# Altium PCB 步进电机（单）.PcbDoc
Units mm, origin at the board's own origin, x right, y up, seen from the top; angles counter-clockwise.
Board outline 94.26 x 60.25 mm, 2 copper layers (Top Layer, Bottom Layer); 48 components, 44 nets, 185 pads, 131 vias.
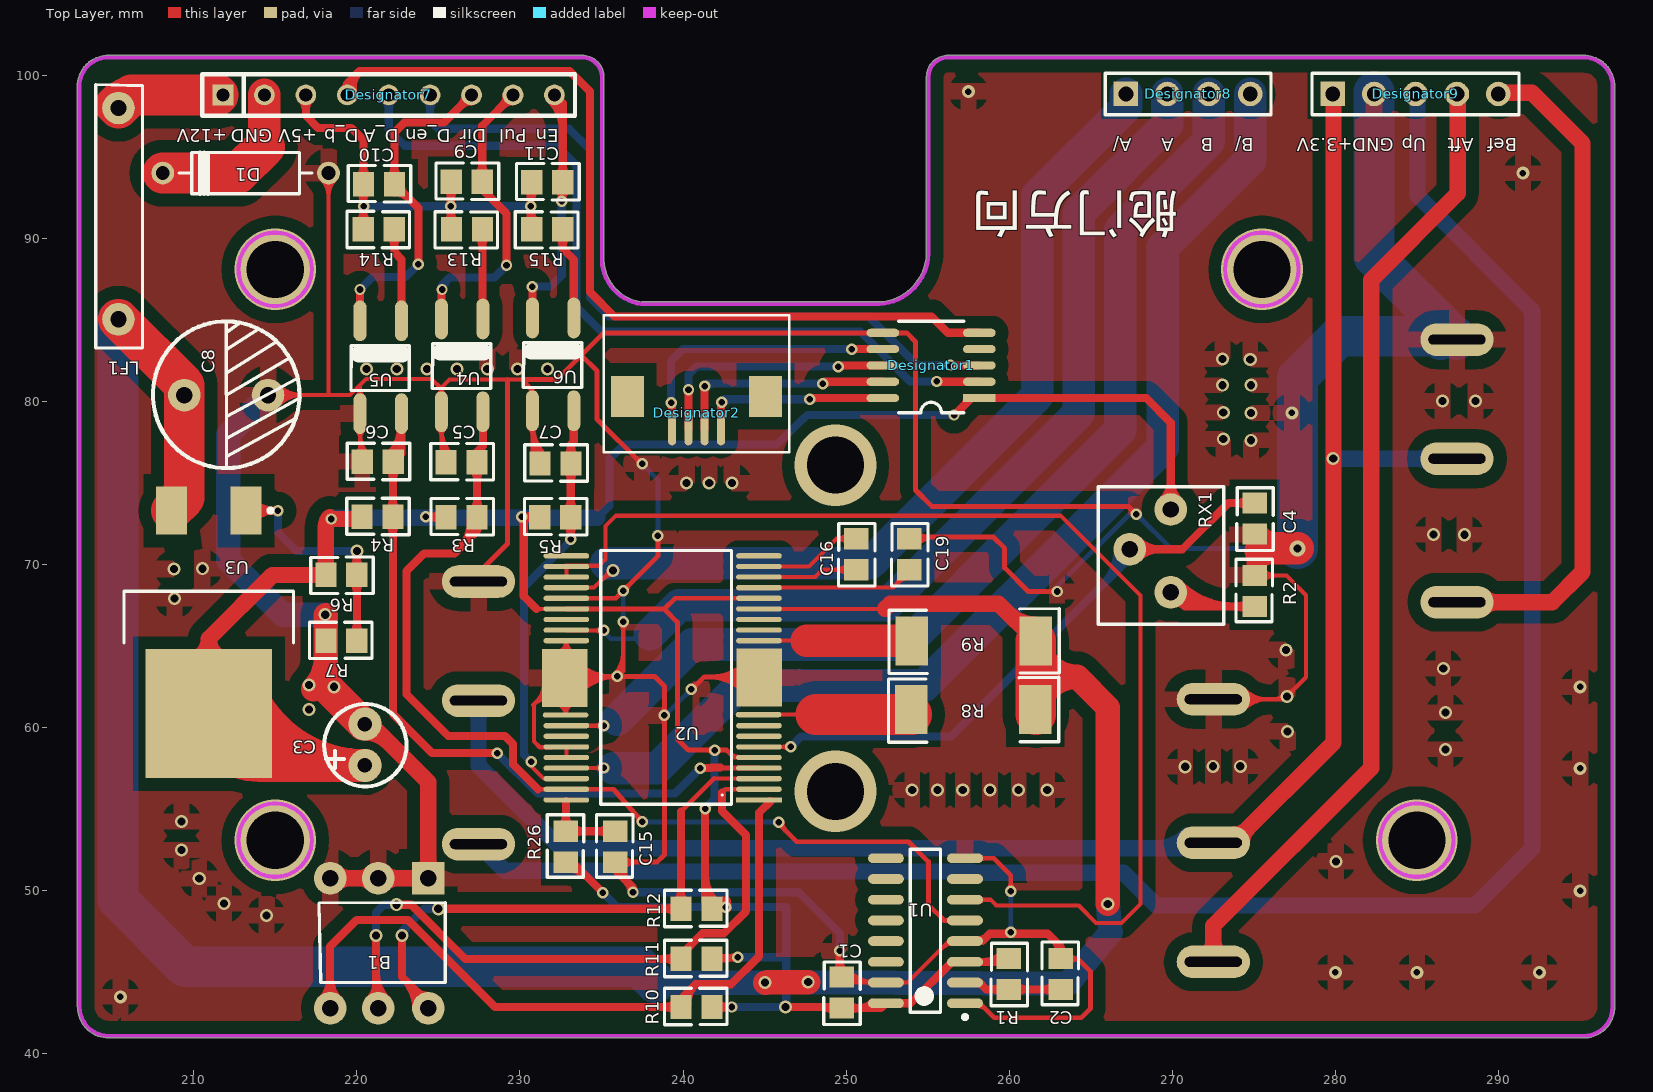
[diagram p0: Top Layer view]
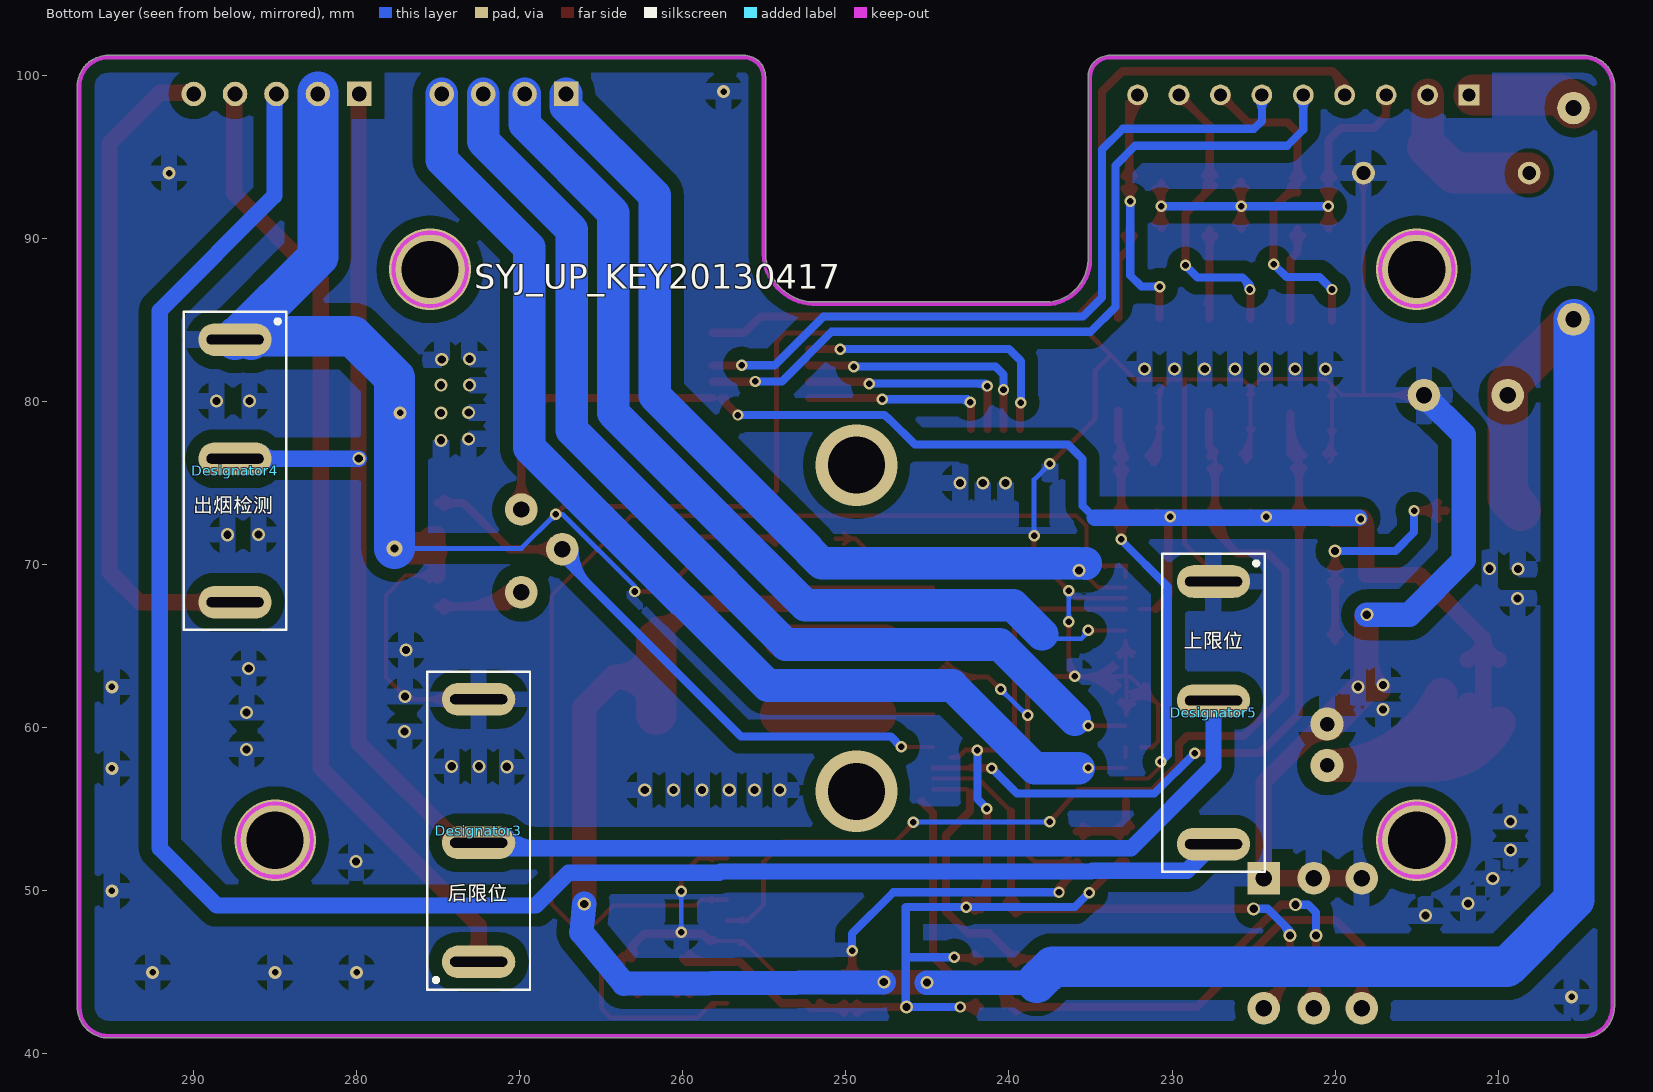
[diagram p1: Bottom Layer view, seen from below]

## Layer stack, top to bottom
Top Layer: signal copper 0.0356
Dielectric: dielectric 0.32, FR-4, Dk 4.8
Bottom Layer: signal copper 0.0356

## Board outline
202.876,42.851 ccw(c204.774,42.876) 204.774,40.978 295.194,40.978 ccw(c295.22,41.102) 295.22,40.975 ccw(c295.22,42.873) 297.113,42.728 ccw(c296.991,42.765) 297.118,42.765 297.118,99.298 ccw(c296.994,99.327) 297.122,99.327 ccw(c295.224,99.327) 295.224,101.225 256.259,101.225 ccw(c256.25,101.098) 256.25,101.226 ccw(c256.25,99.898) 254.923,99.911 ccw(c256.25,99.898) 254.923,99.898 254.923,99.907 cw(c255.05,99.907) 254.923,99.911 254.923,99.907 254.923,89.055 cw(c251.86,89.165) 251.753,86.102 ccw(c251.748,85.975) 251.748,86.102 237.468,86.102 cw(c237.804,88.733) 235.152,88.674 cw(c237.804,88.733) 235.152,88.675 235.152,88.672 235.152,99.898 ccw(c233.825,99.898) 233.825,101.226 ccw(c233.825,101.098) 233.816,101.225 204.76,101.225 ccw(c204.76,99.327) 202.862,99.327 ccw(c202.99,99.327) 202.864,99.309 202.864,42.906 ccw(c202.991,42.906)

## Design rules (kind name [scope] priority, off if disabled: settings)
Clearance [All] p1: gap=0.8
PlaneConnect [All] p1: planeconnectstyle=Relief reliefexpansion=0.508 reliefentries=4 reliefconductorwidth=0.5 reliefairgap=0.5
PolygonConnect [All] p1: connectstyle=Relief reliefconductorwidth=1 reliefentries=4 polygonreliefangle="90 Angle"
RoutingVias [All] p1: holewidth=0.711 width=1.27 viastyle="Through Hole" minholewidth=0.711 minwidth=1.27 maxholewidth=0.711 maxwidth=1.27
SilkscreenOverComponentPads [All] p1: minsilkscreentomaskgap=0.254
SolderMaskExpansion [All] p1: expansion=0.102
TestPointUsage [All] p1: valid=0 allowmultiple=FALSE
Testpoint [All] p1: side=3 testpointundercomponent=TRUE minsize=1.016 maxsize=2.54 preferedsize=1.524 minholesize=0 maxholesize=1.016 preferedholesize=0.813 testpointgrid=0.025 style=297 order=0123456789
Width [All] p1: maxlimit=3 minlimit=0.254 preferedwidth=0.5
22 further rules are at their usual default settings.

## Classes and differential pairs
component class 步进电机（单）: B1 C1 C2 C3 C4 C5 C6 C7 C8 C9 C10 C11 C15 C16 C19 D1 J1 J2 LF1 R1 R2 R3 R4 R5 R6 R7 R8 R9 R10 R11 R12 R13 R14 R15 R26 RX1 U1 U2 U3 U4 U5 U6

## Components (designator, comment, footprint, x,y, rotation, side; value= is the part's Value field where it differs from the comment)
B1 "DIP switch" 拨码开关-3 224.358,50.8 r0 top
C1 "104" 0805 249.718,43.757 r90 top
C2 "SOP-CAP" 0805 263.154,44.9 r270 top
C3 "10uF" CAP 220.497,58.953 r90 top
C4 "104" 0805 275.041,72.826 r90 top
C5 "104" 0805 226.416,76.276 r180 top
C6 "104" 0805 221.285,76.302 r180 top
C7 "104" 0805 232.181,76.2 r180 top
C8 "470uF" "470uF CAP" 214.554,80.391 r180 top
C9 "104" 0805 226.739,93.483 r180 top
C10 "104" 0805 221.354,93.331 r180 top
C11 "104" 0805 231.673,93.447 r180 top
C15 "104" 0805 235.839,52.705 r270 top
C16 "104" 0805 250.622,70.637 r90 top
C19 "104" 0805 253.873,70.637 r90 top
D1 "二极管" 二极管 213.182,94.005 r180 top
Designator1 "Comment" LB1848 257.708,80.213 r180 top
Designator2 "Comment" 间距1.0mm软排线底座 244.526,80.315 r180 top
Designator3 "Comment" 限位开关 275.666,43.944 r90 bottom
Designator4 "Comment" 限位开关 284.302,85.496 r270 bottom locked
Designator5 "Comment" 限位开关 224.307,70.663 r270 bottom locked
Designator7 "Comment" SIP9 211.811,98.806 r0 top
Designator8 "Comment" HDR1X4 267.157,98.857 r0 top
Designator9 "Comment" HDR1X5 279.832,98.857 r0 top
LF1 "LF" LF 205.384,98.019 r270 top
R1 "22R" 0805 259.979,44.9 r90 top
R2 "22R" 0805 275.044,68.381 r270 top
R3 "22R" 0805 226.422,72.907 r180 top
R4 "22R" 0805 221.259,72.923 r180 top
R5 "22R" 0805 232.163,72.907 r180 top
R6 "22R" 0805 219.05,69.367 r180 top
R7 "22R" 0805 219.05,65.329 r0 top
R8 "1R00" 1R00 254.991,59.588 r90 top
R9 "1R00" 1R00 255.016,63.805 r90 top
R10 "22R" 0805 240.817,42.875 r0 top
R11 "22R" 0805 240.817,45.822 r0 top
R12 "22R" 0805 240.817,48.895 r0 top
R13 "22R" 0805 226.746,90.551 r0 top
R14 "22R" 0805 221.348,90.571 r0 top
R15 "22R" 0805 231.673,90.551 r0 top
R26 "22R" 0805 232.816,52.705 r270 top
RX1 "F-RX" F-RX 269.9,73.381 r270 top
U1 "CD15438BM" CD14538BM 254.864,47.549 r180 top
U2 "TB62209FG" TB62209FG 244.704,59.487 r180 top
U3 "LM317" LM317-SOP 210.922,65.811 r270 top
U4 "Optocoupler" 光耦 225.236,80.516 r90 top
U5 "Optocoupler" 光耦 220.246,80.402 r90 top
U6 "Optocoupler" 光耦 230.813,80.576 r90 top

## Footprints (in the part's own frame and the unit in brackets; to place one, negate y for a bottom-side part, rotate by r counter-clockwise, add the part's x,y. Pads: shape width x height; smd on the part's side, far side on the other; paste and mask are expansions set on the pad)
1R00 [mm]
  rect 3x2 smd: 1(1.524,0.991) 2(1.524,-6.604)
  silkscreen extent -0.48,-8.05 3.51,2.39
"470uF CAP" [mm]
  round 2 hole 1: 1(0,0) 2(5.131,0)
  silkscreen extent -1.98,-4.52 7.06,4.47
0805 [mm]
  rect 1.3x1.5 smd: 1(-0.95,0) 2(0.95,0)
  silkscreen extent -1.96,-1.14 1.88,1.09
CAP [mil]
  round 80 hole 35: 1(-50,0) 2(50,0)
  silkscreen extent -100,-100 98,98
CD14538BM [mm] "SOP, 16-Leads,"
  oval 2.2x0.6 smd: 1(-2.425,4.445) 2(-2.425,3.175) 3(-2.425,1.905) 4(-2.425,0.635) 5(-2.425,-0.635) 6(-2.425,-1.905) 7(-2.425,-3.175) 8(-2.425,-4.445) 9(2.425,-4.445) 10(2.425,-3.175) 11(2.425,-1.905) 12(2.425,-0.635) 13(2.425,0.635) 14(2.425,1.905) 15(2.425,3.175) 16(2.425,4.445)
  silkscreen extent -2.55,-5 0.93,5.42, body extent -2,-5 2,5, height 1.75
F-RX [mm]
  round 2 hole 1: 1(0,0) 2(2.438,-2.515) 3(5.08,0)
  silkscreen extent -1.4,-4.44 7.04,3.25
HDR1X4 [mm] "Connector; Header; 4 Position"
  rect 1.5x1.5 hole 0.9: 1(0,0)
  round 1.5 hole 0.9: 2(2.54,0) 3(5.08,0) 4(7.62,0)
  silkscreen extent -1.27,-1.27 8.89,1.27
HDR1X5 [mm] "Connector; Header; 5 Position"
  rect 1.5x1.5 hole 0.9: 1(0,0)
  round 1.5 hole 0.9: 2(2.54,0) 3(5.08,0) 4(7.62,0) 5(10.16,0)
  silkscreen extent -1.27,-1.27 11.43,1.27
LB1848 [mm]
  rect 2x0.5 smd: 1(-0.457,0)
  oval 2x0.5 smd: 2(-0.457,-1) 3(-0.457,-2) 4(-0.457,-3) 5(-0.457,-4) 6(5.461,-4) 7(5.461,-3) 8(5.461,-2) 9(5.461,-1) 10(5.461,0)
  silkscreen extent 0.5,-4.7 4.5,0.89
LF [mm]
  round 2 hole 1: 1(0.025,0) 2(12.979,0)
  silkscreen extent -1.42,-1.4 14.73,1.47
LM317-SOP [mm] "D2"
  rect 2.95x1.9 smd: 1(-7.5,2.28) 3(-7.5,-2.28)
  rect 7.9x7.75 smd: 4(4.95,0)
  silkscreen extent -7.62,-5.2 0.6,5.2, body extent -2.55,-5.2 6.8,5.2, height 4.6
SIP9 [mil]
  rect 50x50 hole 32: 1(-0.66,-0.41)
  round 50 hole 32: 2(99.34,-0.41) 3(199.34,-0.41) 4(299.34,-0.41) 5(399.34,-0.41) 6(499.34,-0.41) 7(599.34,-0.41) 8(699.34,-0.41) 9(799.34,-0.41)
  silkscreen extent -51,-50 849,50
TB62209FG [mm]
  rect 2.8x0.32 smd: 1(0.051,3.912)
  oval 2.8x0.32 smd: 2(0.051,3.262) 3(0.051,2.612) 4(0.051,1.962) 5(0.051,1.312) 6(0.051,0.662) 7(0.051,0.012) 8(0.051,-0.638) 9(0.076,-1.314) 10(0.051,-5.85) 11(0.051,-6.5) 12(0.051,-7.15) 13(0.051,-7.8) 14(0.051,-8.45) 15(0.051,-9.1) 16(0.051,-9.75) 17(0.051,-10.4) 18(0.051,-11.05) 19(11.856,-11.05) 20(11.856,-10.4) 21(11.856,-9.75) 22(11.856,-9.1) 23(11.856,-8.45) 24(11.856,-7.8) 25(11.856,-7.15) 26(11.856,-6.5) 27(11.856,-5.85) 28(11.906,-1.288) 29(11.856,-0.638) 30(11.856,0.012) 31(11.856,0.662) 32(11.856,1.312) 33(11.856,1.962) 34(11.856,2.612) 35(11.856,3.262) 36(11.856,3.912)
  rect 2.8x3.55 smd: 37(0.027,-3.581) 38(11.957,-3.556)
  silkscreen extent 1.73,-11.38 9.77,4.18
二极管 [mm]
  round 1.4 hole 0.85: 1(-5.08,0) 2(5.08,0)
  silkscreen extent -4.06,-1.27 4.06,1.27
光耦 [mm]
  oval 2.5x0.8 smd: 1(-1.143,0.051) 2(-1.143,-2.489) 3(4.547,-2.489) 4(4.547,0.051)
  silkscreen extent 0.28,-2.97 3.02,0.61
拨码开关-3 [mm]
  rect 2x2 hole 1: 1(0.025,-0.025)
  round 2 hole 1: 2(-3.048,-0.025) 3(-5.994,-0.025) 4(-5.994,-8.001) 5(-3.048,-8.001) 6(0.025,-8.001)
  silkscreen extent -6.68,-6.43 1.07,-1.52
间距1.0mm软排线底座 [mm]
  rect 2x2.5 smd: 0(-0.533,0) 0(7.933,0)
  oval 0.5x2 smd: 1(5.2,2) 2(4.2,2) 3(3.2,2) 4(2.2,2)
  silkscreen extent -1.98,-4.98 9.4,3.43
限位开关 [mm]
  oval 2x4.5 hole 0.6 slot 3.5 at 90 deg: 1(17.8,-3.15) 2(1.7,-3.15) 3(9,-3.15)
  silkscreen extent 0,-6.3 19.5,0

## Via types
v1: diameter 0.8, hole 0.5, Top Layer to Bottom Layer, 61 vias
v2: diameter 0.7, hole 0.4, Top Layer to Bottom Layer, 53 vias
v3: diameter 0.8, hole 0.4, Top Layer to Bottom Layer, 10 vias
v4: diameter 5, hole 3.5, Top Layer to Bottom Layer, 6 vias
v5: diameter 1, hole 0.5, Top Layer to Bottom Layer, 1 vias

## Nets (pads, with @x,y where several pads share a name; then routed paths per layer and width w, separated by ;. In a path a pad name is that pad's centre, name@x,y a point inside that pad or via, vN(x,y) a via of type N, cw(c..) or ccw(c..) an arc to the next point about the centre after c; other vN are vias at no path point)
+5V: C1.1 C3.1 Designator1.1 R1.2 R3.2 R4.2 R5.2 R6.2 R10.2 R11.2 R12.2 R26.2 RX1.1 U1.3 U1.16 U2.5 U2.14 U2.24 U3.4 | length 230.2
  Top Layer w0.254: 231.011,67.287 U2.24@231.978,67.287
  Top Layer w0.3: U2.24 238.864,67.287 ; v2@241.794,58.482 ccw(c241.452,58.14) 241.452,58.623 ccw(c241.452,59.106) v2@241.794,58.765 ; v2@242.076,58.482 cw(c242.418,58.14) 242.418,58.623 cw(c242.418,59.106) v2@242.076,58.765 ; 242.895,58.4 ccw(c243.413,58.917) U2.5@243.413,58.185 ; U2.5@243.586,58.191 243.103,58.191 242.672,58.623 240.335,58.623 239.649,59.309 239.649,66.472 238.864,67.257 238.864,67.287 ; U2.14 239.514,67.937 238.864,67.287
  Top Layer w0.5: U3.4 213.388,58.395 U3.4@213.436,58.395 ; 218.1,72.354 v2(218.44,72.796) ; v2(224.231,72.923) R3.2@225.456,72.923 ; v2@224.468,72.923 cw(c224.468,71.903) R3.2@225.19,72.625 ; v2@224.545,72.923 ccw(c224.545,73.834) R3.2@225.19,73.19 ; v2@230.028,72.853 cw(c229.524,72.348) 230.237,72.348 ; v2@230.208,72.923 cw(c230.208,71.903) R5.2@230.93,72.625 ; v2@230.286,72.923 ccw(c230.286,73.834) R5.2@230.93,73.19 ; 231.011,67.287 230.237,68.061 230.237,72.785 v2(230.099,72.923) R5.2@231.197,72.923 ; R26.2@232.822,51.76 232.852,51.791 233.172,51.791 v2(235.077,49.886) ; R26.2@232.916,51.355 cw(c232.916,49.686) 234.096,50.866 ; R12.2@241.351,49.312 v2(241.351,55.042) ; 241.351,49.759 ccw(c242.532,49.759) R12.2@241.697,48.924 ; 241.351,50.966 ccw(c243.739,50.966) R12.2@242.05,49.278 ; R12.2@241.722,48.849 cw(c242.181,48.39) v2@242.562,48.916 ; R10.2 v2(242.976,42.875) ; R11.2 v2(243.357,45.923) ; R12.2 242.098,49.225 v2(242.621,48.997) ; R12.2@242.009,49.136 cw(c242.402,48.743) v2@242.729,49.193 ; R10.2@242.05,42.592 cw(c242.733,41.91) 242.733,42.875 cw(c242.733,43.841) R10.2@242.05,43.158 ; R11.2@242.068,45.657 cw(c242.537,45.245) 242.497,45.868 ; R12.2@242.067,49.195 cw(c242.566,48.695) 242.692,49.39 ; R12.2@242.089,48.758 cw(c242.536,48.428) v2@242.758,48.937 ; R11.2@242.113,46.123 ccw(c242.549,46.377) 242.581,45.874 ; v1(246.278,42.875) 249.649,42.875 C1.1 252.142,42.807 U1.16 253.949,43.104 256.489,45.644 259.773,45.644 R1.2 ; 248.487,42.875 cw(c248.487,41.676) C1.1@249.335,42.524 ; 248.817,42.875 ccw(c248.817,43.607) C1.1@249.335,43.09 ; C1.1@250.1,42.524 cw(c250.783,41.841) 250.783,42.807 cw(c250.783,43.772) C1.1@250.1,43.09 ; 250.801,42.807 ccw(c250.801,43.942) U1.16@251.603,43.139 ; v2(256.616,79.172) 256.642,79.172 Designator1.1@257.658,80.188 ; 257.227,79.757 ccw(c256.77,80.213) Designator1.1@257.416,80.213 ; Designator1.1 268.402,80.213 269.9,78.715 RX1.1 ; 258.416,45.644 ccw(c258.416,47.313) R1.2@259.596,46.133 ; RX1.1@269.37,73.911 ccw(c268.09,75.191) 269.9,75.191 ccw(c271.711,75.191) RX1.1@270.431,73.911
  Top Layer w1: U3.4@209.963,64.173 ccw(c209.583,65.456) 210.922,65.456 ; U3.4 210.922,65.456 ; U3.4@211.88,64.173 cw(c212.26,65.456) 210.922,65.456 ; 218.1,72.337 cw(c218.9,72.337) v2@218.334,72.902 ; 218.1,72.354 R6.2 214.833,69.367 210.922,65.456 ; v2(218.44,72.796) R4.2@220.167,72.796
  Top Layer w2: U3.4@209.911,60.292 ccw(c214.09,62.335) U3.4@214.09,57.683 ; U3.4@211.708,61.171 ccw(c217.293,63.9) 217.293,57.683 ; U3.4@213.436,58.395 214.147,57.683 C3.1 cw(c220.497,65.466) U3.4@213.505,62.049
  Bottom Layer w0.5: v2(218.44,72.796) v2@218.516,72.873 ; 234.747,72.873 235.483,73.609 235.483,76.479 236.372,77.368 245.77,77.368 247.345,78.943 247.396,78.943 ; v2(235.077,49.886) 235.966,48.997 246.329,48.997 246.329,42.875 v2(242.976,42.875) ; v2(241.351,55.042) 241.935,55.626 v2(241.935,58.623) ; v2(243.357,45.923) 246.329,45.923 ; v1@246.172,42.981 ccw(c245.794,43.36) 246.329,43.36 ; 247.371,78.918 247.625,79.172 v2(256.616,79.172)
  Bottom Layer w1: v2@218.516,72.873 234.747,72.873
A: Designator8.2 U2.26 | length 60.4
  Top Layer w0.254: U2.26@232.871,65.964 v2(235.128,65.964) ; v2@234.97,65.806 ccw(c234.589,65.425) 234.589,65.964 ccw(c234.589,66.502) v2@234.97,66.121
  Bottom Layer w0.254: v2@235.128,65.741 cw(c235.128,65.386) 235.378,65.637 ; v2(235.128,65.964) 235.128,65.888 235.56,65.456 237.642,65.456 ; v2@235.35,65.949 ccw(c235.938,65.91) 235.521,65.494
  Bottom Layer w2: 237.973,65.735 239.751,67.513 252.476,67.513 264.263,79.3 264.263,91.579 269.697,97.013 Designator8.2
A\: Designator8.1 U2.22 | length 58.4
  Top Layer w0.254: U2.22 234.55,68.587 235.661,69.698 v1(235.712,69.647) ; 235.073,69.109 cw(c235.712,68.469) v1@235.712,69.374 ; 235.318,69.354 ccw(c235.025,69.647) v1@235.439,69.647
  Bottom Layer w0.254: 235.189,69.531 cw(c235.52,69.2) v1@235.704,69.629 ; v1@235.464,69.762 cw(c234.969,69.992) 235.128,69.469 ; v1@235.57,69.413 ccw(c235.287,68.946) 235.128,69.469 ; v1(235.712,69.647) 235.128,69.469 ; 235.737,70.079 235.128,69.469
  Bottom Layer w2: 235.288,70.071 cw(c235.306,70.053) 235.306,70.079 ; 235.737,70.079 251.485,70.079 252.277,70.871 252.277,70.907 261.723,80.352 261.723,92.631 267.157,98.065 Designator8.1
B: Designator8.3 U2.29 | length 66.5
  Top Layer w0.254: U2.29@232.851,60.122 v2(235.128,60.122) ; v2@234.97,59.964 ccw(c234.589,59.583) 234.589,60.122 ccw(c234.589,60.66) v2@234.97,60.279
  Bottom Layer w0.254: v2(235.128,60.122) 235.839,60.833 235.839,61.316 ; v2@235.128,60.345 ccw(c235.128,60.883) 235.508,60.502 ccw(c235.889,60.122) v2@235.351,60.122
  Bottom Layer w2: 235.966,60.503 240.563,65.1 253.67,65.1 257.357,68.788 257.357,68.802 266.803,78.248 266.803,90.527 272.237,95.961 Designator8.3
B\: Designator8.4 U2.33 | length 68.9
  Top Layer w0.254: U2.33@232.854,57.531 v2(235.128,57.531) ; v2@234.97,57.373 ccw(c234.589,56.993) 234.589,57.531 ccw(c234.589,58.069) v2@234.97,57.689
  Bottom Layer w2: 235.737,57.506 238.404,57.506 243.484,62.586 254.787,62.586 259.972,67.77 259.972,67.719 269.418,77.165 269.418,89.444 274.777,94.804 Designator8.4
CCPA: C19.1 U2.15 | length 11.9
  Top Layer w0.254: U2.15 252.889,68.587 253.873,69.571 C19.1 ; 252.998,68.695 ccw(c252.312,69.381) C19.1@253.261,69.58 ; 253.25,68.948 cw(c253.773,68.425) C19.1@253.773,69.164 ; 253.33,69.027 ccw(c252.861,69.496) C19.1@253.51,69.632
CCPB: C16.1 U2.16 | length 8.1
  Top Layer w0.254: U2.16 248.104,69.237 248.554,69.687 C16.1 ; C16.1@250.152,69.318 ccw(c249.259,68.425) 249.259,69.687 ccw(c249.259,70.95) C16.1@250.152,70.057
CCPC: C16.2 U2.17 | length 8.3
  Top Layer w0.254: U2.17 247.712,69.887 249.413,71.587 ; C16.2@250.118,71.255 ccw(c249.413,70.673) 249.413,71.587 ; C16.2@250.118,71.92 cw(c249.413,72.502) 249.413,71.587 ; C16.2 249.413,71.587
CR: C15.1 R26.1 U2.36 | length 9.4
  Top Layer w0.5: R26.1@232.534,53.938 ccw(c231.851,54.621) 232.816,54.621 ccw(c233.782,54.621) R26.1@233.099,53.938 ; U2.36@232.816,55.504 R26.1 C15.1 ; R26.1@233.199,53.372 cw(c233.882,52.689) 233.882,53.655 cw(c233.882,54.621) R26.1@233.199,53.938 ; C15.1@235.456,53.372 ccw(c234.773,52.689) 234.773,53.655 ccw(c234.773,54.621) C15.1@235.456,53.938
D1: B1.4 R10.1 U2.1 | length 50.1
  Top Layer w0.254: R10.1 R10.1@239.867,43.373
  Top Layer w0.5: B1.4@217.833,43.329 ccw(c216.553,44.61) 218.364,44.61 ccw(c220.174,44.61) B1.4@218.894,43.329 ; B1.4 218.364,46.584 219.989,48.209 223.139,48.209 228.473,42.875 R10.1 ; R10.1@239.585,42.592 ccw(c238.902,41.91) 238.902,42.875 ccw(c238.902,43.841) R10.1@239.585,43.158 ; R10.1@239.867,43.373 240.767,44.272 ; R10.1@240.267,42.992 cw(c241.976,43.063) 240.767,44.272 ; U2.1@245.351,55.486 244.653,54.788 244.653,45.974 242.951,44.272 240.767,44.272
D2: B1.5 R11.1 U2.2 | length 46.1
  Top Layer w0.254: 242.392,56.032 242.585,56.225 U2.2
  Top Layer w0.5: B1.5@220.78,43.329 ccw(c219.806,44.303) 221.183,44.303 ; 221.183,44.916 ccw(c223.427,44.916) B1.5@221.841,43.329 ; v1(221.183,47.269) 221.183,42.926 B1.5 ; v1(222.428,49.149) 223.317,49.149 226.644,45.822 R11.1 239.867,46.07 241.194,47.396 242.519,47.396 243.865,48.743 243.865,53.416 242.392,54.889 242.392,56.032 ; R11.1@239.585,45.539 ccw(c238.902,44.856) 238.902,45.822 ccw(c238.902,46.787) R11.1@239.585,46.104
  Bottom Layer w0.5: v1(221.183,47.269) 221.183,48.666 221.666,49.149 v1(222.428,49.149)
D3: B1.6 R12.1 U2.3 | length 42.4
  Top Layer w0.254: 241.889,56.875 U2.3
  Top Layer w0.3: 239.867,54.854 241.889,56.875
  Top Layer w0.5: v1(222.758,47.269) 222.758,44.729 224.384,43.104 B1.6 ; 222.888,44.6 cw(c221.087,42.799) B1.6@223.634,42.799 ; 223.624,43.864 ccw(c224.384,44.624) B1.6@224.384,43.549 ; 223.741,43.746 cw(c222.794,42.799) B1.6@224.134,42.799 ; v1(224.993,48.895) R12.1 239.867,54.854 ; R12.1@239.585,48.612 ccw(c238.902,47.929) 238.902,48.895 ccw(c238.902,49.861) R12.1@239.585,49.178 ; R12.1@239.585,49.278 ccw(c238.902,49.961) 239.867,49.961 ccw(c240.833,49.961) R12.1@240.15,49.278
  Bottom Layer w0.5: v1(222.758,47.269) 222.758,47.523 224.13,48.895 v1(224.993,48.895) ; v1@222.908,47.269 cw(c223.883,47.269) 223.194,47.959
GND: B1.1 B1.2 B1.3 C1.2 C2.1 C3.2 C4.1 C5.2 C6.2 C7.2 C8.1 C15.2 C19.2 D1.1 Designator1.6 Designator3.1 Designator4.2 Designator5.2 Designator9.2 R2.1 R7.1 U1.1 U1.4 U1.8 U1.15 U2.23 U2.27 U2.28 U2.31 U2.32 U2.37 U2.38 U4.1 U5.1 U6.1 | length 484.2
  Top Layer w0.254: C8.1 219.583,80.391 220.574,81.382 224.587,81.382 225.185,80.783 ; C8.1@214.991,79.953 cw(c216.048,78.897) 216.048,80.391 cw(c216.048,81.885) C8.1@214.991,80.829 ; C8.1@215.171,79.774 cw(c216.661,78.283) 216.661,80.391 cw(c216.661,82.499) C8.1@215.171,81.008 ; D1.1@217.857,93.6 cw(c216.879,92.622) 218.262,92.622 cw(c219.646,92.622) D1.1@218.667,93.6 ; D1.1@218.037,93.78 cw(c217.492,93.235) 218.262,93.235 cw(c219.032,93.235) D1.1@218.488,93.78 ; D1.1 218.262,80.467 218.338,80.391 ; C6.2@219.965,76.771 ccw(c219.409,77.328) 220.195,77.328 ; U5.1@220.002,78.216 cw(c219.536,77.75) 220.195,77.75 cw(c220.854,77.75) U5.1@220.388,78.216 ; U5.1@220.002,80.302 ccw(c219.536,80.768) 220.195,80.768 ccw(c220.854,80.768) U5.1@220.388,80.302 ; 220.195,77.388 ccw(c221.321,77.388) C6.2@220.525,76.592 ; 220.195,78.001 ccw(c221.934,78.001) C6.2@220.705,76.771 ; 220.195,81.003 220.195,76.441 C6.2 ; C3.2@220.396,60.223 C3.2 ; U4.1@224.992,78.33 cw(c224.526,77.864) 225.185,77.864 cw(c225.844,77.864) U4.1@225.378,78.33 ; U4.1@224.996,80.42 ccw(c224.573,80.862) 225.185,80.862 ; 225.185,77.089 ccw(c226.179,77.089) C5.2@225.476,76.387 ; 225.185,77.703 ccw(c226.792,77.703) C5.2@225.656,76.566 ; U4.1@225.185,78.316 ccw(c227.405,78.316) C5.2@225.835,76.746 ; U4.1@225.374,80.42 cw(c225.798,80.862) 225.185,80.862 ; C5.2 225.185,76.557 225.185,80.862 ; 230.422,81.058 cw(c229.647,80.283) U6.1@230.743,80.283 ; U6.1@230.569,78.39 cw(c230.103,77.924) 230.762,77.924 cw(c231.421,77.924) U6.1@230.955,78.39 ; U6.1@230.643,80.529 ccw(c230.552,80.718) 230.762,80.718 ; C7.2@230.762,76.856 ccw(c231.788,76.856) C7.2@231.062,76.131 ; 230.762,77.469 ccw(c232.401,77.469) C7.2@231.242,76.311 ; 230.762,78.083 ccw(c233.014,78.083) C7.2@231.422,76.49 ; U6.1@230.762,78.696 ccw(c233.627,78.696) C7.2@231.601,76.67 ; 230.806,61.388 cw(c231.845,60.349) U2.38@232.377,61.718 ; U6.1@230.881,80.529 cw(c230.972,80.718) 230.762,80.718 ; 231.04,61.622 ccw(c229.995,62.668) U2.38@231.473,62.668 ; 231.081,61.663 cw(c231.999,60.745) U2.38@232.469,61.955 ; C7.2 230.762,76.669 230.762,80.718 ; U2.38@231.356,61.938 cw(c232.153,61.141) U2.38@232.561,62.192 ; U2.38@231.474,62.056 ccw(c230.862,62.668) U2.38@231.727,62.668 ; U2.31@231.902,58.801 231.216,58.801 230.861,59.157 230.861,61.443 232.562,63.144 U2.38@232.848,63.144 ; U2.38@232.309,61.472 cw(c232.055,60.775) U2.28 ; U2.38@232.337,64.623 ccw(c232.094,65.337) U2.27 ; U2.38@232.397,61.711 cw(c232.187,61.138) 232.797,61.138 ; U2.38@232.419,64.383 ccw(c232.215,64.982) 232.848,64.982 ; 232.797,61.168 cw(c233.424,61.168) U2.38@233.166,61.739 ; U2.32 U2.31 ; 232.848,64.921 ccw(c233.519,64.921) U2.38@233.212,64.324 ; U2.38@233.27,61.508 ccw(c233.602,60.775) U2.28 ; U2.38@233.328,64.55 cw(c233.732,65.337) U2.27 ; C1.2 250.051,44.374 253.771,44.374 256.311,46.914 U1.4@258.369,46.914 ; C1.2@249.828,44.717 ccw(c250.658,45.547) 250.658,44.374 ; C1.2@250.008,44.897 ccw(c251.271,46.16) 251.271,44.374 ; C1.2@250.187,45.077 ccw(c251.884,46.773) U1.15@251.884,44.374 ; U1.15@251.516,44.251 ccw(c251.221,43.956) 251.221,44.374 ccw(c251.221,44.791) U1.15@251.516,44.496 ; U1.15@253.361,44.251 cw(c253.656,43.956) 253.656,44.374 cw(c253.656,44.791) U1.15@253.361,44.496 ; 255.891,46.493 cw(c256.489,45.895) U1.4@256.489,46.741 ; Designator3.1 v1@276.956,61.744 ; Designator3.1@274.204,61.306 cw(c275.261,60.249) 275.261,61.744 cw(c275.261,63.238) Designator3.1@274.204,62.181 ; Designator3.1@274.384,61.126 cw(c275.874,59.636) 275.874,61.744 cw(c275.874,63.851) Designator3.1@274.384,62.361 ; R2.1 276.998,69.331 278.206,68.123 278.206,63.094 v1@276.956,61.844 ; R2.1@275.514,68.961 cw(c276.407,68.068) 276.407,69.331 cw(c276.407,70.593) R2.1@275.514,69.701 ; 276.188,61.744 ccw(c276.188,62.665) v1@276.84,62.014 ; v1@276.66,61.844 cw(c276.66,61.447) v1@276.94,61.728 ; v1@277.033,62.194 ccw(c277.033,62.853) 277.499,62.387 ccw(c277.965,61.921) v1@277.306,61.921 ; 225.185,80.862 225.679,81.356 230.124,81.356 230.762,80.718 ; U2.28 232.797,62.992 U2.38 U2.38@232.848,63.144 ; U2.38@232.848,63.144 U2.27
  Top Layer w0.3: Designator5.2 227.457,69.495 229.235,71.272 229.235,81.356 ; 230.124,81.356 232.283,81.356 235.14,84.213 253.708,84.213 254.254,83.668 254.254,74.574 255.272,73.556 267.312,73.556 v2(267.792,73.076) ; U2.23 235.882,67.937 238.455,70.51 v2(238.455,71.78) ; U2.38@233.096,63.144 238.252,63.144 238.862,62.535 238.862,52.222 238.394,51.755 C15.2 ; U2.38@233.206,62.583 cw(c234.561,61.228) 234.561,63.144 ; U2.38@233.418,62.371 cw(c235.285,60.504) 235.285,63.144 ; U2.38@233.418,63.715 ccw(c234.795,65.091) 234.795,63.144 ; U2.38@233.63,62.159 cw(c236.009,59.78) v2@236.009,63.144 ; U2.38@233.63,63.927 ccw(c235.519,65.815) 235.519,63.144 ; 233.765,82.838 234.721,81.882 234.721,78.918 237.465,76.175 v2(237.49,76.175) ; v2@235.825,63.003 ccw(c235.483,62.662) 235.483,63.144 ccw(c235.483,63.627) 235.825,63.286 ccw(c234.602,64.508) 236.331,64.508 ; v2@235.991,63.144 236.331,63.484 v2(236.331,66.488) ; v2@236.037,63.074 ccw(c235.326,63.784) 236.331,63.784 ; v2@236.107,63.003 cw(c236.449,62.662) 236.449,63.144 cw(c236.449,63.627) v2@236.107,63.286 ; v2@236.19,66.346 cw(c235.848,66.005) 236.331,66.005 cw(c236.814,66.005) v2@236.472,66.346 ; C15.2@236.293,51.401 cw(c237.146,50.548) 237.146,51.755 cw(c237.146,52.962) C15.2@236.293,52.109 ; v2@236.331,68.586 ccw(c236.331,69.069) 236.672,68.728 ccw(c237.014,68.386) v2@236.531,68.386 ; 237.105,76.534 ccw(c237.49,76.919) v2@237.49,76.375 ; 237.167,76.473 cw(c236.868,76.175) v2@237.29,76.175 ; v2@238.314,71.639 cw(c237.972,71.298) 238.455,71.298 cw(c238.938,71.298) v2@238.597,71.639 ; v2@238.695,60.615 cw(c238.292,60.213) 238.862,60.213 ; v2@238.695,60.898 ccw(c238.292,61.301) 238.862,61.301 ; 238.862,60.335 cw(c239.258,60.335) v2@238.978,60.615 ; 238.862,61.178 ccw(c239.258,61.178) v2@238.978,60.898 ; v2(240.513,62.357) 240.538,62.357 241.3,63.119 U2.37@244.119,63.119 ; v2@240.513,62.557 ccw(c240.513,63.101) 240.897,62.716 ; v2@240.713,62.357 cw(c241.134,62.357) 240.836,62.655 ; 241.536,63.119 cw(c241.536,59.928) U2.37@243.793,62.184 ; 241.781,63.119 ccw(c241.781,65.963) U2.37@243.793,63.952 ; 242.26,63.119 cw(c242.26,60.652) U2.37@244.005,62.396 ; 242.506,63.119 ccw(c242.506,65.239) U2.37@244.005,63.74 ; 242.985,63.119 cw(c242.985,61.376) U2.37@244.217,62.609 ; 243.23,63.119 ccw(c243.23,64.515) U2.37@244.217,63.528 ; C19.2@254.061,71.399 254.366,71.704 259.004,71.704 259.715,70.993 259.715,69.799 261.163,68.351 v2(262.941,68.351) ; C19.2@254.114,71.446 cw(c254.738,70.823) 254.738,71.704 ; C19.2@254.327,71.234 cw(c255.462,70.098) 255.462,71.704 ; C19.2@254.327,71.941 ccw(c254.898,72.513) 254.898,71.704 ; U1.1 258.191,43.104 259.08,42.215 264.414,42.215 264.973,42.774 264.973,45.06 264.211,45.822 ; U1.8 259.055,51.994 260.096,50.952 v2(260.096,49.962) ; U1.1@258.089,42.954 cw(c258.089,42.344) 258.519,42.775 ; U1.8@258.195,51.888 cw(c258.451,51.632) 258.451,51.994 cw(c258.451,52.356) U1.8@258.195,52.1 ; v2@259.955,50.103 ccw(c259.613,50.445) 260.096,50.445 ccw(c260.579,50.445) v2@260.237,50.103 ; v2@262.799,68.21 ccw(c262.458,67.869) 262.458,68.351 ccw(c262.458,68.834) v2@262.799,68.493 ; C2.1@263.373,45.822 264.211,45.822 ; C2.1@263.651,45.545 cw(c264.211,45.116) 264.211,45.822 ; C2.1@263.677,46.116 ccw(c264.211,46.452) 264.211,45.822 ; v2@267.592,73.076 ccw(c267.109,73.076) 267.451,73.417 ccw(c267.792,73.759) v2@267.792,73.276
  Top Layer w0.5: C15.2@235.61,51.511 236.931,50.19 v2(236.931,49.911) ; C15.2@235.842,51.78 ccw(c236.535,51.599) 236.029,51.093 ; C15.2@236.326,51.654 ccw(c237.512,51.343) 236.645,50.477 ; 236.563,50.559 cw(c235.915,49.911) v2@236.831,49.911 ; C1.2@249.335,44.99 ccw(c248.68,45.644) 249.606,45.644 ; 249.606,45.701 ccw(c250.612,45.701) C1.2@249.9,44.99 ; v2(249.606,46.33) 249.606,44.819 C1.2 ; U1.4@258.089,46.964 ccw(c258.089,47.761) 258.652,47.197 ; U1.4@258.369,46.914 258.826,47.371 262.357,47.371 263.154,46.573 ; 259.671,47.371 ccw(c259.671,47.873) v2@260.025,47.518 ; v2@260.167,47.518 ccw(c260.521,47.873) 260.521,47.371 ; 262.719,47.009 cw(c261.66,45.949) C2.1@263.154,45.843 ; C2.1@262.941,46.189 ccw(c262.7,46.573) 263.154,46.573 ; C2.1 263.154,46.573 ; C2.1@263.367,46.189 cw(c263.609,46.573) 263.154,46.573
  Top Layer w1: B1.3 B1.1 224.384,56.667 220.828,60.223 C3.2 ; B1.3@218.717,50.421 cw(c219.571,49.567) 219.571,50.775 cw(c219.571,51.982) B1.3@218.717,51.128 ; C3.2@220.497,59.707 cw(c220.497,57.664) 221.942,59.109 ; B1.2@220.957,50.421 ccw(c220.103,49.567) 220.103,50.775 ccw(c220.103,51.982) B1.2@220.957,51.128 ; B1.2@221.664,50.421 cw(c222.517,49.567) 222.517,50.775 cw(c222.517,51.982) B1.2@221.664,51.128 ; B1.1@224.03,50.421 ccw(c223.176,49.567) 223.176,50.775 ccw(c223.176,51.982) 224.03,51.128 ccw(c223.176,51.982) 224.384,51.982 ccw(c225.591,51.982) B1.1@224.737,51.128 ; R2.1 C4.1@275.044,71.873
  Top Layer w1.5: v1@217.316,62.364 ccw(c215.424,64.256) 218.1,64.256 ; 218.1,62.52 v1@218.1,66.888 ; 218.1,62.854 ccw(c218.937,62.854) v1@218.345,62.262 ; C4.1@275.393,71.628 ccw(c276.927,73.162) 276.927,70.993
  Top Layer w2: 218.1,62.52 C3.2@220.396,60.223 ; 275.412,70.841 275.565,70.993 v5(277.673,70.993)
  Bottom Layer w0.3: v2@236.19,66.629 ccw(c235.848,66.971) 236.331,66.971 ccw(c236.814,66.971) v2@236.472,66.629 ; v2@236.19,68.245 cw(c235.848,67.903) 236.331,67.903 cw(c236.814,67.903) v2@236.472,68.245 ; v2(236.331,66.488) v2(236.331,68.386) ; v2@237.49,75.975 cw(c237.49,75.492) 237.831,75.833 cw(c238.173,76.175) v2@237.69,76.175 ; v2(237.49,76.175) 238.455,75.209 v2(238.455,71.78) ; v2@238.314,71.922 ccw(c237.972,72.263) 238.455,72.263 ccw(c238.938,72.263) v2@238.597,71.922 ; v2(238.836,60.757) 238.912,60.757 v2(240.513,62.357) ; v2@238.836,60.957 ccw(c238.836,61.624) 239.308,61.152 ; v2@239.036,60.757 cw(c239.335,60.757) 239.124,60.968 ; v2@240.313,62.357 cw(c239.83,62.357) 240.171,62.016 cw(c240.513,61.674) v2@240.513,62.157 ; v2@259.955,47.589 ccw(c259.613,47.93) 260.096,47.93 ccw(c260.579,47.93) v2@260.237,47.589 ; v2@259.955,49.82 cw(c259.613,49.479) 260.096,49.479 cw(c260.579,49.479) v2@260.237,49.82 ; v2(260.096,47.447) v2(260.096,49.962) ; v2(262.941,68.351) 262.916,68.632 267.324,73.04 ; 267.35,73.076 267.818,73.076 269.9,70.993 v5(277.673,70.993) ; v2@267.792,72.876 cw(c267.792,72.332) 268.177,72.716 ; v2@267.992,73.076 ccw(c268.414,73.076) 268.116,72.778 ; v5@277.425,70.746 ccw(c276.828,70.148) 276.828,70.993 ccw(c276.828,71.838) v5@277.425,71.24
  Bottom Layer w0.5: v2(236.931,49.911) 247.091,49.911 249.631,47.371 v2@249.631,46.431
  Bottom Layer w1.5: C8.1 212.115,77.953 212.115,70.282 215.468,66.929 v1(218.059,66.929)
  Bottom Layer w2.5: v5(277.673,70.993) 277.673,81.458 280.213,83.998 Designator4.2@287.325,83.998 ; Designator9.2@282.372,98.984 282.372,88.877 Designator4.2 ; 285.745,85.504 cw(c284.038,83.796) Designator4.2@286.452,83.796
  other v1: 214.452,48.489 211.861,49.225 210.337,50.749 280.035,51.791 209.245,52.502 209.245,54.254 254.051,56.185 255.6,56.185 257.15,56.185 258.826,56.185 260.579,56.185 262.331,56.185 270.789,57.607 272.491,57.633 274.168,57.633 286.741,58.674 277.063,59.766 286.741,60.935 217.068,61.112 277.033,61.921 218.592,62.509 217.068,62.611 286.614,63.627 276.962,64.77 208.813,67.92 208.788,69.723 210.541,69.748 286.015,71.843 287.909,71.831 240.208,75.006 241.605,75.006 243.002,75.006 274.828,77.622 273.126,77.699 274.828,79.299 273.126,79.324 286.563,80.035 288.595,80.035 273.075,81.001 274.828,81.001 220.599,81.991 222.449,81.991 224.299,81.991 226.149,81.991 227.999,81.991 229.849,81.991 231.699,81.991 274.777,82.575 273.075,82.601
  other v2: 235.966,63.144
  other v3: 205.5,43.5 280,45 285,45 292.5,45 295,50 295,57.5 295,62.5 277.328,79.299 291.5,94 257.5,99
J1: C9.1 Designator7.8 U4.4 | length 23.4
  Top Layer w0.5: U4.4 225.185,86.831 v2(225.222,86.868) ; C9.1@227.406,93.866 ccw(c226.723,94.549) 227.689,94.549 ccw(c228.654,94.549) C9.1@227.971,93.866 ; C9.1@227.448,93.248 229.175,91.52 v2(229.175,88.345) ; C9.1 227.689,96.91 Designator7.8 ; C9.1@227.89,93.401 ccw(c228.854,93.227) 228.161,92.534 ; Designator7.8@229.189,98.796 cw(c228.259,98.796) 228.917,98.138 cw(c229.574,97.481) Designator7.8@229.574,98.411 ; C9.1@227.796,93.033 cw(c227.617,92.707) 227.989,92.707 ccw(c227.617,92.707) C9.1@227.796,93.033
  Bottom Layer w0.5: v2@225.222,87.147 225.679,87.605 228.434,87.605 v2(229.175,88.345) ; v2@225.322,86.868 cw(c226.238,86.868) 225.59,87.516
J2: C10.1 Designator7.7 U5.4 | length 25
  Top Layer w0.5: v2(220.193,86.868) 220.195,86.865 U5.4 ; C10.1@222.021,93.714 ccw(c221.338,94.396) 222.304,94.396 ccw(c223.269,94.396) C10.1@222.587,93.714 ; C10.1@222.304,92.831 cw(c222.304,91.624) 223.157,92.477 ; C10.1@222.704,93.231 ccw(c223.428,93.231) C10.1@222.916,92.719 ; v2(223.774,88.417) 223.774,91.861 C10.1 222.304,96.498 222.91,97.104 225.342,97.104 Designator7.7 ; Designator7.7@226.649,98.796 cw(c225.719,98.796) 226.377,98.138 cw(c227.034,97.481) Designator7.7@227.034,98.411
  Bottom Layer w0.5: v2(220.193,86.868) 220.955,87.63 222.987,87.63 v2(223.774,88.417)
J3: C11.1 Designator7.9 U6.4 | length 21.5
  Top Layer w0.5: v2(230.759,87.046) 230.762,87.043 U6.4 ; Designator7.9@231.842,98.523 cw(c229.954,96.636) 232.623,96.636 ; Designator7.9 232.623,98.286 C11.1 ; Designator7.9@232.195,98.877 cw(c231.161,97.843) 232.623,97.843 ; C11.1@232.341,93.064 cw(c231.805,92.528) v2@232.562,92.528 ; C11.1@232.341,93.829 ccw(c231.658,94.512) 232.623,94.512 ccw(c233.589,94.512) C11.1@232.906,93.829 ; v2@232.562,92.277 cw(c233.635,92.277) C11.1@232.898,93.056 ; v2(232.562,92.278) C11.1@232.562,93.386
  Bottom Layer w0.5: v2(230.759,87.046) 231.877,87.046 232.562,87.732 v2(232.562,92.278)
L1: C8.2 LF1.2 R8.2 R9.2 U2.13 U3.3 | length 164.9
  Top Layer w0.254: U2.13 252.381,67.287
  Top Layer w1: 252.381,67.287 252.703,67.608 259.341,67.608 R9.2 ; 259.913,67.036 ccw(c261.62,68.743) R9.2@261.62,66.329
  Top Layer w1.5: v1(245.034,44.374) 245.116,44.374 245.192,44.399 v1(247.675,44.399) ; 261.62,63.119 264.16,63.119 ; R8.2@261.828,61.522 cw(c264.16,60.618) 264.16,63.119 ; R9.2@261.862,64.892 ccw(c264.16,65.495) 264.16,63.119 ; v1(266.04,49.2) 266.04,61.239 264.16,63.119
  Top Layer w2.5: LF1.2 209.423,81.001 209.423,74.093 U3.3 ; U3.3@208.854,73.624 ccw(c207.479,74.999) 209.423,74.999 ; R8.2@261.62,60.808 R9.2
  Bottom Layer w1.5: 238.303,44.374 v1(245.034,44.374) ; v1(247.675,44.399) 263.617,44.298 266.212,47.468 v1(266.04,49.2)
  Bottom Layer w2.5: LF1.2@205.359,85.039 205.359,49.454 209.474,45.339 237.338,45.339 238.303,44.374
NetC2_2: C2.2 R1.1 U1.2 | length 10.6
  Top Layer w0.5: U1.2 258.166,44.374 258.59,43.95 R1.1 C2.2 ; R1.1@259.596,43.667 ccw(c258.914,42.984) 258.914,43.95 ccw(c258.914,44.915) R1.1@259.596,44.233 ; R1.1@260.362,43.667 cw(c261.045,42.984) 261.045,43.95 cw(c261.045,44.915) R1.1@260.362,44.233 ; C2.2@262.771,43.667 ccw(c262.089,42.984) 262.089,43.95 ccw(c262.089,44.915) C2.2@262.771,44.233
NetC4_2: C4.2 RX1.2 U2.6 | length 46.7
  Top Layer w0.254: U2.6 U2.6 v2(246.609,58.826) ; v2@246.451,58.669 ccw(c246.07,58.288) 246.07,58.826 ccw(c246.07,59.365) v2@246.451,58.984
  Top Layer w0.5: RX1.2@267.386,70.307 RX1.2 270.612,70.942 273.445,73.776 C4.2 ; RX1.2@267.916,70.412 cw(c269.196,69.132) 269.196,70.942 cw(c269.196,72.753) RX1.2@267.916,71.473 ; C4.2@274.658,73.493 ccw(c273.975,72.81) 273.975,73.776 ccw(c273.975,74.741) C4.2@274.658,74.059
  Bottom Layer w0.5: v2(246.609,58.826) 247.244,59.461 256.438,59.461 267.386,70.409 RX1.2 ; 265.728,68.751 ccw(c263.537,70.942) RX1.2@266.636,70.942 ; 266.582,69.605 ccw(c265.244,70.942) RX1.2@267.136,70.942
NetC9_2: C9.2 C10.2 C11.2 Designator7.3 R13.1 R14.1 R15.1 | length 38.9
  Top Layer w0.5: Designator7.3@216.602,98.523 cw(c215.944,97.866) 216.874,97.866 cw(c217.803,97.866) Designator7.3@217.146,98.523 ; Designator7.3 216.874,97.527 217.627,96.774 219.659,96.774 220.404,96.029 C10.2 R14.1@220.404,90.577 ; R14.1@220.115,90.954 ccw(c219.418,91.651) v2@220.404,91.651 ; C10.2@220.121,92.948 cw(c219.438,92.265) 220.404,92.265 cw(c221.369,92.265) C10.2@220.687,92.948 ; C10.2@220.121,93.714 ccw(c219.438,94.396) 220.404,94.396 ccw(c221.369,94.396) C10.2@220.687,93.714 ; 220.404,91.622 ccw(c221.349,91.622) R14.1@220.681,90.954 ; C9.2@225.506,93.1 cw(c224.904,92.498) 225.755,92.498 ; R13.1@225.513,90.934 ccw(c224.928,91.519) 225.755,91.519 ; R13.1@225.755,90.592 v2(225.755,91.973) 225.755,93.45 C9.2 ; v2@225.755,91.715 ccw(c226.86,91.715) R13.1@226.079,90.934 ; 225.755,92.337 cw(c226.835,92.337) C9.2@226.071,93.1 ; R15.1@230.441,90.934 ccw(c229.917,91.457) 230.657,91.457 ; C11.2@230.441,93.064 cw(c229.917,92.54) 230.657,92.54 ; R15.1@230.657,90.617 v2(230.657,91.973) C11.2@230.657,93.381 ; v2@230.657,91.776 ccw(c231.848,91.776) R15.1@231.006,90.934 ; v2@230.657,92.222 cw(c231.848,92.222) C11.2@231.006,93.064
  Bottom Layer w0.5: v2(220.421,91.973) v2(225.755,91.973) v2(230.657,91.973)
NetD1_2: D1.2 Designator7.2 | length 10.1
  Top Layer w2: 214.334,95.614 Designator7.2
  Top Layer w2.5: D1.2 212.725,94.005 214.334,95.614
NetJ1_6: Designator7.1 LF1.1 | length 8.1
  Top Layer w2.5: LF1.1@205.208,98.17 cw(c206.718,96.66) 206.718,98.796 ; LF1.1 206.187,98.796 Designator7.1@211.5,98.796
NetR2_2: R2.2 RX1.3 | length 15.4
  Top Layer w0.5: RX1.3@269.724,68.124 ccw(c271.397,69.797) 271.397,67.431 ; RX1.3 270.77,67.431 R2.2 ; RX1.3@270.077,68.477 ccw(c272.604,71.004) 272.604,67.431 ; RX1.3@270.431,68.831 ccw(c273.811,72.211) 273.811,67.431 ; R2.2@274.661,67.148 ccw(c273.978,66.465) 273.978,67.431 ccw(c273.978,68.396) R2.2@274.661,67.714
NetR6_1: R6.1 R7.2 U3.1 | length 21.3
  Top Layer w0.5: U3.1 213.209,73.304 v2(215.163,73.304) ; U3.1@213.697,72.816 cw(c214.875,71.638) v2@214.875,73.304 ; U3.1@213.697,73.806 ccw(c214.908,75.018) v2@214.908,73.304 ; R7.2@219.717,65.712 ccw(c219.034,66.394) 220,66.394 ccw(c220.965,66.394) R7.2@220.282,65.712 ; R6.1@219.717,68.985 cw(c219.034,68.302) 220,68.302 cw(c220.965,68.302) R6.1@220.282,68.985 ; R6.1@219.717,69.75 ccw(c219.034,70.433) 220,70.433 ccw(c220.965,70.433) R6.1@220.282,69.75 ; R7.2 R6.1 220,70.825 v1(220.015,70.841)
  Bottom Layer w0.5: v2(215.163,73.304) 215.163,71.984 216.306,70.841 v1(220.015,70.841)
NetR13_2: R13.2 U4.3 | length 7.3
  Top Layer w0.5: R13.2@227.413,90.168 cw(c226.73,89.485) 227.696,89.485 cw(c228.661,89.485) R13.2@227.979,90.168 ; U4.3@227.696,85.092 R13.2 ; 227.696,86.346 ccw(c228.158,86.346) U4.3@227.831,86.018
NetR14_2: R14.2 U5.3 | length 7.3
  Top Layer w0.5: R14.2@222.015,90.188 cw(c221.332,89.505) 222.298,89.505 cw(c223.263,89.505) R14.2@222.581,90.188 ; R14.2 222.298,89.157 222.735,88.719 U5.3
NetR15_2: R15.2 U6.3 | length 7.2
  Top Layer w0.5: R15.2@232.341,90.168 cw(c231.658,89.485) 232.623,89.485 cw(c233.589,89.485) R15.2@232.906,90.168 ; R15.2 232.623,89.372 233.302,88.694 U6.3
NewNet1: Designator1.2 Designator7.5 | length 51.3
  Top Layer w0.5: v2@255.565,81.213 Designator1.2
  Bottom Layer w0.5: Designator7.5@221.682,98.523 cw(c221.024,97.866) 221.954,97.866 cw(c222.883,97.866) Designator7.5@222.226,98.523 ; Designator7.5 221.954,96.664 222.936,95.682 232.268,95.682 233.477,94.473 233.477,85.801 235.001,84.277 250.876,84.277 253.924,81.229 v2(255.549,81.229)
NewNet2: Designator1.3 Designator7.6 | length 48.2
  Top Layer w0.5: v2@256.394,82.213 Designator1.3
  Bottom Layer w0.5: Designator7.6@224.222,98.523 cw(c223.564,97.866) 224.494,97.866 cw(c225.423,97.866) Designator7.6@224.766,98.523 ; Designator7.6 224.494,97.197 224.968,96.723 233.02,96.723 234.29,95.453 234.29,86.385 235.458,85.217 251.384,85.217 254.381,82.22 v2(256.388,82.22)
NewNet3: Designator1.8 Designator2.2 | length 15.8
  Top Layer w0.5: Designator2.2 240.326,80.712 v2(240.335,80.721) ; v2@249.574,82.213 Designator1.8 ; v2@249.575,82.073 cw(c249.914,81.734) 249.914,82.213
  Bottom Layer w0.5: v2(240.335,80.721) 240.335,81.661 240.817,82.144 241.376,82.144 v2(249.504,82.144)
NewNet4: Designator1.7 Designator2.1 | length 17.7
  Top Layer w0.5: v2@239.197,79.863 cw(c238.887,79.553) 239.326,79.553 ; Designator2.1 v2@239.326,79.876 ; v2(250.342,83.21) 250.345,83.213 Designator1.7
  Bottom Layer w0.5: v2(239.268,79.934) 239.268,82.474 240.005,83.21 v2(250.342,83.21)
NewNet5: Designator1.5 Designator7.4 | length 56
  Top Layer w0.5: Designator7.4@219.302,98.768 cw(c220.183,98.986) 219.541,99.628 ; Designator7.4 219.414,99.5 220.167,100.254 ; Designator7.4@219.787,98.888 cw(c221.186,99.235) 220.167,100.254 ; Designator1.5 256.248,84.213 255.245,85.217 235.783,85.217 234.29,86.71 234.29,99.009 233.045,100.254 220.167,100.254
NewNet6: Designator1.9 Designator2.3 | length 14.6
  Top Layer w0.5: Designator2.3 v2(241.325,80.95) ; v2@248.635,81.031 cw(c249.074,80.593) 249.074,81.213 ; v2@248.675,81.213 Designator1.9
  Bottom Layer w0.5: v2(241.325,80.95) 241.478,81.102 v2(248.564,81.102) ; v2@241.396,80.879 cw(c241.935,80.34) 241.935,81.102
NewNet7: Designator1.10 Designator2.4 | length 12.7
  Top Layer w0.5: Designator2.4 242.326,79.918 v2(242.367,79.959) ; v2(247.777,80.137) 247.853,80.213 Designator1.10 ; v2@247.848,80.066 cw(c248.202,79.712) 248.202,80.213
  Bottom Layer w0.5: v2(242.367,79.959) 242.545,80.137 v2(247.777,80.137) ; v2@242.438,79.888 cw(c243.037,79.289) 243.037,80.137
NewNet8: Designator3.3 Designator4.3 Designator5.3 Designator9.1 | length 116.5
  Top Layer w1: Designator3.3@272.516,53.044 Designator3.3@273.744,53.044 ; Designator3.3@273.744,52.944 279.883,59.082 Designator9.1@279.883,98.933 ; Designator3.3@273.766,53.444 ccw(c273.766,54.598) 274.582,53.782 ; Designator3.3@274.266,52.944 cw(c275.526,52.944) 274.635,53.835
  Bottom Layer w1: Designator5.3@227.104,61.309 cw(c226.25,60.456) 227.457,60.456 cw(c228.665,60.456) Designator5.3@227.811,61.309 ; Designator5.3 227.457,57.658 232.512,52.603 272.076,52.603 Designator3.3@272.516,53.044 ; 268.996,52.603 ccw(c268.996,55.313) Designator3.3@270.913,53.397 ; v1(279.866,76.496) Designator4.3 ; Designator4.3@285.849,76.143 ccw(c284.995,75.289) 284.995,76.496 ccw(c284.995,77.704) Designator4.3@285.849,76.85
NewNet9: Designator4.1 Designator9.5 | length 43
  Top Layer w1: Designator4.1 293.299,67.696 295.148,69.545 295.148,95.834 292.049,98.933 Designator9.5@290.043,98.933 ; Designator4.1@289.056,67.343 cw(c289.909,66.489) 289.909,67.696 cw(c289.909,68.904) Designator4.1@289.056,68.05
NewNet10: Designator5.1 Designator9.3 | length 117.7
  Bottom Layer w1: Designator5.1 229.088,51.232 234.899,51.232 234.95,51.181 257.684,51.181 257.761,51.105 267.005,51.105 269.011,49.098 288.569,49.098 292.075,52.603 292.075,85.573 285.039,92.608 285.039,98.857 Designator9.3@284.963,98.933 ; Designator9.3@284.735,98.807 cw(c284.002,98.074) 285.039,98.074
NewNet11: Designator3.2 Designator9.4 | length 61.3
  Top Layer w1: Designator3.2@272.163,46.097 ccw(c271.309,46.951) 272.516,46.951 ccw(c273.723,46.951) Designator3.2@272.87,46.097 ; Designator3.2@272.516,45.744 272.516,47.853 282.194,57.531 282.194,87.452 287.503,92.761 Designator9.4@287.503,98.933
O1: C5.1 R3.1 U1.5 U2.35 U4.2 | length 73.6
  Top Layer w0.254: C5.1 C5.1@227.366,76.921
  Top Layer w0.3: 231.1,56.225 235.737,56.225 v2(237.49,54.229) ; v2@237.29,54.242 ccw(c236.809,54.273) 237.171,54.592 ccw(c237.534,54.91) v2@237.503,54.429 ; v2(245.872,54.204) 245.872,54.102 246.964,53.01 253.822,53.01 255.041,51.791 255.041,49.149 256.007,48.184 U1.5 ; v2@246.072,54.204 ccw(c246.8,54.204) 246.285,53.689 ; U1.5@256.383,48.078 ccw(c256.126,47.822) 256.126,48.184 ccw(c256.126,48.546) U1.5@256.383,48.29
  Top Layer w0.5: 226.349,71.054 ccw(c224.821,72.582) R3.1@226.974,72.772 ; C5.1@227.083,75.893 cw(c226.384,75.194) 227.372,75.194 ; R3.1@227.09,73.29 ccw(c226.407,73.973) 227.372,73.973 ccw(c228.338,73.973) R3.1@227.655,73.29 ; 227.107,71.811 ccw(c226.213,72.705) R3.1@227.472,72.816 ; R3.1@227.157,72.47 cw(c226.905,72.077) 227.372,72.077 ; C5.1@227.366,76.921 227.725,77.281 ; 227.372,75.227 cw(c228.315,75.227) C5.1@227.648,75.893 ; C5.1@227.372,76.117 227.372,72.077 ; R3.1@227.588,72.47 ccw(c227.84,72.077) 227.372,72.077 ; C5.1@227.682,76.62 cw(c228.08,76.926) 227.725,77.281 ; U4.2 227.725,77.281 ; 231.1,56.225 229.565,57.76 229.565,59.004 229.083,59.487 225.603,59.487 223.037,62.052 223.037,69.596 224.13,70.688 225.984,70.688 227.372,72.077
  Bottom Layer w0.3: v2(237.49,54.229) v2@245.796,54.229 ; v2@237.631,54.088 cw(c237.973,53.746) 237.973,54.229 cw(c237.973,54.712) v2@237.631,54.37 ; 245.328,54.229 cw(c245.328,53.659) v2@245.731,54.062 ; 245.45,54.229 ccw(c245.45,54.625) v2@245.731,54.345
O2: C6.1 R4.1 U2.4 U5.2 | length 51.4
  Top Layer w0.3: 242.32,57.532 U2.4@244.653,57.532
  Top Layer w0.5: R4.1@221.927,72.541 cw(c221.244,71.858) 222.209,71.858 cw(c223.175,71.858) R4.1@222.492,72.541 ; R4.1@221.927,73.306 ccw(c221.244,73.989) 222.209,73.989 ccw(c223.175,73.989) R4.1@222.492,73.306 ; C6.1@221.952,75.919 cw(c221.33,75.297) 222.209,75.297 ; C6.1@221.952,76.684 ccw(c220.061,78.576) U5.2@222.735,78.576 ; 222.209,75.175 cw(c223.262,75.175) C6.1@222.518,75.919 ; C6.1@222.306,76.331 ccw(c221.268,77.369) 222.735,77.369 ; U5.2 222.735,76.802 C6.1 222.209,76.276 R4.1 222.209,60.848 224.612,58.445 v2@228.422,58.445 ; v2(241.046,57.506) 241.072,57.532 241.711,57.532 241.734,57.555 242.297,57.555
  Bottom Layer w0.5: v2(228.6,58.445) 231.089,55.956 239.497,55.956 v2(241.046,57.506)
O3: C7.1 R5.1 U2.34 U6.2 | length 31.8
  Top Layer w0.254: v2(230.683,57.912) 230.683,57.649 231.457,56.875 U2.34
  Top Layer w0.5: R5.1@232.83,72.525 cw(c232.147,71.842) 233.113,71.842 cw(c234.078,71.842) R5.1@233.396,72.525 ; R5.1@232.83,73.29 ccw(c232.147,73.973) 233.113,73.973 ccw(c234.078,73.973) R5.1@233.396,73.29 ; C7.1@232.849,75.817 cw(c232.211,75.179) 233.113,75.179 ; C7.1@232.849,76.583 ccw(c232.166,77.266) 233.131,77.266 ccw(c234.097,77.266) C7.1@233.414,76.583 ; 233.113,75.089 cw(c234.142,75.089) C7.1@233.414,75.817 ; C7.1@233.113,76.181 233.113,71.56 v2(233.121,71.552) ; C7.1 233.131,77.379 233.299,77.546 233.299,79.43 U6.2
  Bottom Layer w0.5: v2(230.683,57.912) 230.251,58.344 230.251,68.631 233.147,71.526 v2(233.121,71.552)
Q1: U1.6 U2.20 U2.21 | length 72
  Top Layer w0.254: U2.20@232.791,69.926 234.848,69.926 235.255,70.333 235.255,72.365 235.89,73 263.144,73 268.046,68.097 268.046,49.2 266.878,48.031 265.328,48.031 264.262,49.098 259.207,49.098 258.851,49.454 U1.6 ; U2.21 U2.20 ; U2.20@234.111,69.863 cw(c234.263,69.712) 234.263,69.926 ; U1.6@258.211,49.331 cw(c258.506,49.036) 258.506,49.454 cw(c258.506,49.871) U1.6@258.211,49.576
R1: R8.1 U2.9 | length 9.4
  Top Layer w0.254: U2.9 248.151,60.801
  Top Layer w2.5: 248.158,60.808 R8.1@254.025,60.808
R2: R9.1 U2.10 | length 9.4
  Top Layer w0.254: U2.10 247.591,65.337
  Top Layer w2: 247.599,65.329 R9.1
pads on no net: Designator1.4 Designator2.0 U1.7 U1.9 U1.10 U1.11 U1.12 U1.13 U1.14 U2.7 U2.8 U2.11 U2.12 U2.18 U2.19 U2.25 U2.30
copper on no net:
  other v4: 214.999,53.098 284.999,53.098 249.349,56.098 249.349,76.098 214.999,88.098 275.499,88.098

## Polygon pours and split planes (outlines as drawn)
GND on Top Layer "Top Layer-No Net" (solid): 204.76,101.098 202.99,99.327 202.99,42.89 204.774,41.105 295.331,41.105 296.991,42.765 296.991,99.331 295.224,101.098 256.25,101.098 255.05,99.898 255.05,89.277 251.748,85.975 237.722,85.975 235.025,88.672 235.025,99.905 233.832,101.098
GND on Bottom Layer "Top Layer-No Net" (solid): 204.76,101.098 202.99,99.327 202.99,42.89 204.774,41.105 295.331,41.105 296.991,42.765 296.991,99.331 295.224,101.098 256.25,101.098 255.05,99.898 255.05,89.277 251.748,85.975 237.722,85.975 235.025,88.672 235.025,99.905 233.832,101.098

## Keep-outs
Keep-Out Layer:
  circle w0.254: c284.991,53.105 r2.25
  circle w0.254: c275.491,88.105 r2.25
  circle w0.254: c214.991,53.105 r2.25
  circle w0.254: c214.991,88.105 r2.25
  lines w0.254: 202.99,99.327 cw(c204.76,99.327) 204.76,101.098 233.832,101.098 ; 202.991,42.906 202.991,99.327 ; 203.003,42.876 ccw(c204.774,42.876) 204.774,41.105 234.991,41.105 295.22,41.105 ; 233.825,101.098 cw(c233.825,99.898) 235.025,99.898 235.025,88.672 ccw(c237.804,88.733) 237.46,85.975 ; 237.439,85.975 251.748,85.975 ccw(c251.86,89.165) 255.05,89.052 255.05,99.907 ; 255.05,99.898 cw(c256.25,99.898) 256.25,101.098 ; 256.241,101.098 295.224,101.098 cw(c295.224,99.327) 296.994,99.327 ; 295.22,41.102 ccw(c295.22,42.873) 296.991,42.873 ; 296.991,42.765 296.991,99.327

## Silkscreen, mask and mechanical layers (free items; w line width, h text height)
Top Overlay:
  text "+12V" at 212.065,96.701 h0.8 r180
  text "GND" at 214.808,96.701 h0.8 r180
  text "+5V" at 217.576,96.701 h0.8 r180
  text "D_b" at 220.116,96.701 h0.8 r180
  text "D_A" at 222.555,96.701 h0.8 r180
  text "D_en" at 225.755,96.701 h0.8 r180
  text "Dir" at 227.94,96.701 h0.8 r180
  text "Pul" at 230.429,96.701 h0.8 r180
  text "En" at 232.385,96.701 h0.8 r180
  text "A/" at 267.5,96.133 h0.8 r180
  text "A" at 270.1,96.133 h0.8 r180
  text "B" at 272.5,96.133 h0.8 r180
  text "B/" at 275,96.133 h0.8 r180
  text "+3.3V" at 281.075,96.133 h0.8 r180
  text "GND" at 283.589,96.133 h0.8 r180
  text "Up" at 285.571,96.133 h0.8 r180
  text "Aft" at 288.492,96.133 h0.8 r180
  text "Bef" at 291.159,96.133 h0.8 r180
  text "舱门方向" at 270.4,93.4 h4 r180
Bottom Overlay:
  text "SYJ_UP_KEY20130417" at 272.8,86.9 h1.5
  text "出烟检测" at 290,72.9 h1.52
  text "上限位" at 229.3,64.6 h1.52
  text "后限位" at 274.4,49.1 h1.52

## Dimensions
295.224,101.098 to 295.22,41.105 on Top Overlay
202.991,99.327 to 296.991,99.327 on Top Overlay